# Altium PCB nRF24L01_SMA.PcbDoc
Units mm, origin at the board's own origin, x right, y up, seen from the top; angles counter-clockwise.
Board outline 23.92 x 11.74 mm, 2 copper layers (Top Layer, Bottom Layer); 18 components, 18 nets, 64 pads, 30 vias.
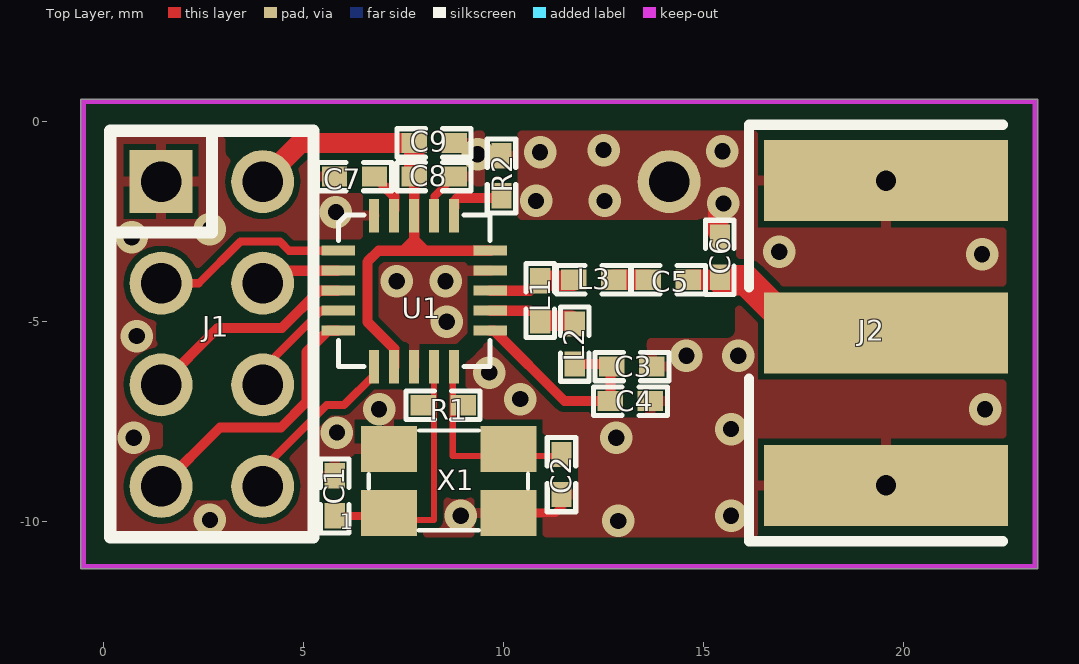
[diagram p0: Top Layer view]
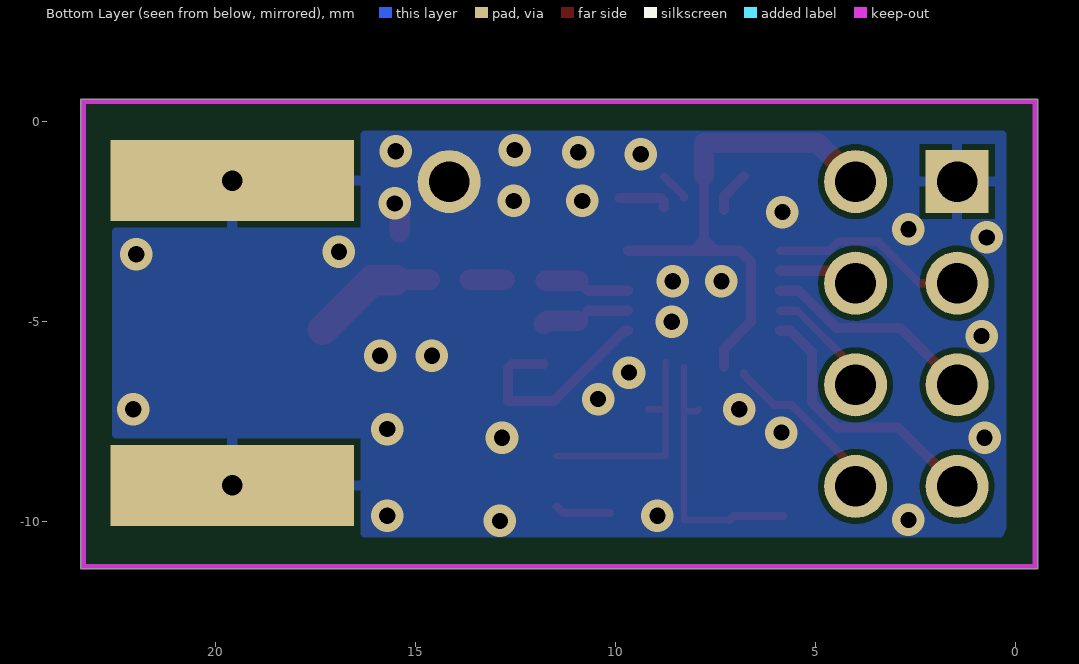
[diagram p1: Bottom Layer view, seen from below]

## Layer stack, top to bottom
Top Layer: signal copper 0.0356
Dielectric: core 0.32, FR-4, Dk 4.8
Bottom Layer: signal copper 0.0356

## Board outline
-0.563,-11.181 23.36,-11.181 23.36,0.563 -0.563,0.563

## Design rules (kind name [scope] priority, off if disabled: settings)
Clearance [All] p1: gap=0.152
ComponentClearance [All] p1: gap=0.254 collisioncheckmode=3 verticalgap=0.254
PolygonConnect PolygonConnect_1 [InComponentClass('All Components')] p1: connectstyle=Relief reliefconductorwidth=0.254 reliefentries=4 polygonreliefangle="90 Angle"
PolygonConnect [All] p2: connectstyle=Direct reliefconductorwidth=0.254 reliefentries=4 polygonreliefangle="90 Angle"
RoutingVias [All] p1: holewidth=0.508 width=0.914 viastyle="Through Hole" minholewidth=0.711 minwidth=1.27 maxholewidth=0.711 maxwidth=1.27
SolderMaskExpansion [All] p1: expansion=0.102
TestPointUsage [All] p1: valid=0 allowmultiple=FALSE
Testpoint [All] p1: side=15 testpointundercomponent=TRUE minsize=1.016 maxsize=2.54 preferedsize=1.524 minholesize=0 maxholesize=1.016 preferedholesize=0.813 testpointgrid=0.025 style=1023 order=0123456789
Width [All] p1: maxlimit=2.54 minlimit=0.127 preferedwidth=0.127
18 further rules are at their usual default settings.

## Components (designator, comment, footprint, x,y, rotation, side; value= is the part's Value field where it differs from the comment)
C1 "15pF" 0402s 5.789,-9.856 r90 top
C2 "15pF" 0402s 11.457,-9.321 r90 top
C3 "2.2nF" 0402s 13.716,-6.121 r180 top
C4 "4.7pF" 0402s 13.678,-6.985 r180 top
C5 "1.0pF" 0402s 14.63,-3.95 r180 top
C6 "0,75pF" 0402s 15.418,-3.886 r90 top
C7 "33nF" 0402s 6.782,-1.372 r180 top
C8 "1nF" 0402s 7.772,-1.372 r0 top
C9 "10nF" 0402s 7.776,-0.533 r0 top
J1 "Comment" IDC8 1.448,-1.499 r270 top
J2 "Comment" SMA_H 19.571,-5.283 r270 top
L1 "3.3nH" 0402s 10.922,-3.975 r270 top
L2 "3.3nH" 0402s 11.786,-6.058 r90 top
L3 "3,3nH" 0402s 11.76,-3.95 r0 top
R1 "1M" 0402s 8.002,-7.088 r0 top
R2 "22k" 0402s 9.957,-1.854 r90 top
U1 "NRF24L01" QFN20L/5x5 6.075,-3.226 r0 top
X1 "16 MHz" BT-XTAL 7.139,-9.781 r0 top

## Footprints (in the part's own frame and the unit in brackets; to place one, negate y for a bottom-side part, rotate by r counter-clockwise, add the part's x,y. Pads: shape width x height; smd on the part's side, far side on the other; paste and mask are expansions set on the pad)
0402s [mil]
  rect 25x20 smd: 1(0,0) 2(39.37,0)
  silkscreen extent -17,-14 56,14
BT-XTAL [mm]
  rect 1.4x1.15 smd: 1(0,0) 2(2.996,0) 3(2.996,1.602) 4(0,1.602)
  silkscreen extent -0.5,-0.43 3.48,2.06
IDC8 [mil]
  rect 62x62 hole 40: 1(0,0)
  round 62 hole 40: 2(0,100) 3(100,0) 4(100,100) 5(200,0) 6(200,100) 7(300,0) 8(300,100)
  silkscreen extent -50,-50 350,150
QFN20L/5x5 [mm]
  rect 0.84x0.25 smd: 1(-0.203,0) 2(-0.203,-0.5) 3(-0.203,-1) 4(-0.203,-1.5) 5(-0.203,-2) 11(3.603,-2) 12(3.603,-1.5) 13(3.603,-1) 14(3.603,-0.5) 15(3.603,0)
  rect 0.25x0.84 smd: 6(0.7,-2.903) 7(1.2,-2.903) 8(1.7,-2.903) 9(2.2,-2.903) 10(2.7,-2.903) 16(2.7,0.878) 17(2.2,0.878) 18(1.7,0.878) 19(1.2,0.878) 20(0.7,0.878)
  silkscreen extent -0.19,-2.89 3.59,0.89
SMA_H [mil]
  rect 80x240 smd: 1(0,0)
  rect 80x240 hole 20: 2(-150,0) 2(150,0)
  silkscreen extent -205,-135 205,115

## Free pads (board coordinates)
  round 1.575 hole 1.016: 0(14.148,-1.499)

## Via types
v1: diameter 0.813, hole 0.406, Top Layer to Bottom Layer, 30 vias

## Nets (pads, with @x,y where several pads share a name; then routed paths per layer and width w, separated by ;. In a path a pad name is that pad's centre, name@x,y a point inside that pad or via, vN(x,y) a via of type N, cw(c..) or ccw(c..) an arc to the next point about the centre after c; other vN are vias at no path point)
CE: J1.3 U1.1 | length 4.9
  Top Layer w0.203: J1.3 2.388,-4.039 3.429,-2.997 4.42,-2.997 4.648,-3.226 U1.1
CSN: J1.4 U1.2 | length 2
  Top Layer w0.254: J1.4 4.301,-3.726 U1.2
GND: C1.2 C2.1 C3.1 C4.1 C6.2 C7.2 C8.2 C9.2 J1.1 J2.2 pad.0 R2.2 U1.8 U1.14 U1.17 U1.20 X1.2 X1.4 | length 2.9
  Top Layer w0.203: 8.28,-1.905 8.28,-1.864 C8.2 ; X1.2 11.302,-9.781 C2.1@11.457,-9.625
  Top Layer w0.508: C6.2@15.38,-2.769 v1@15.38,-2.032
  other v1: 12.878,-9.982 2.667,-9.957 8.941,-9.855 15.697,-9.855 0.762,-7.899 12.827,-7.899 5.842,-7.772 15.697,-7.683 6.896,-7.188 22.047,-7.188 10.427,-6.934 9.652,-6.274 14.58,-5.855 15.875,-5.855 0.838,-5.359 8.585,-5.004 7.341,-3.988 8.56,-3.988 21.971,-3.315 16.904,-3.251 0.711,-2.896 2.667,-2.692 5.817,-2.261 15.507,-2.045 10.82,-1.981 12.535,-1.981 9.36,-0.813 10.922,-0.762 15.481,-0.737 12.509,-0.711
IRQ: J1.8 U1.6 | length 4.2
  Top Layer w0.203: J1.8 3.988,-8.687 5.588,-7.087 6.02,-7.087 6.775,-6.332 U1.6@6.775,-6.281
MISO: J1.7 U1.5 | length 6.8
  Top Layer w0.254: J1.7 2.921,-7.645 4.445,-7.645 5.08,-7.01 5.08,-5.766 5.62,-5.226 U1.5
MOSI: J1.6 U1.4 | length 2.9
  Top Layer w0.203: J1.6 3.988,-6.185 5.447,-4.726 U1.4
N00009: C7.1 U1.19 | length 1
  Top Layer w0.254: C7.1 7.275,-1.864 U1.19@7.275,-2.21
N00010: C1.1 R1.1 U1.9 X1.1 | length 6.7
  Top Layer w0.152: X1.1@7.139,-9.959 8.275,-9.959 8.275,-9.957 8.275,-7.239 7.95,-7.239 R1.1@7.901,-7.19 ; R1.1@8.275,-7.19 U1.9
  Top Layer w0.203: C1.1 7.036,-9.856 X1.1@7.139,-9.959
N00012: R2.1 U1.16 | length 1.3
  Top Layer w0.254: U1.16@8.775,-2.147 8.775,-1.995 8.865,-1.905 R2.1@9.906,-1.905
N00013: C2.2 R1.2 U1.10 X1.3 | length 6.9
  Top Layer w0.152: 8.738,-8.355 C2.2@11.457,-8.355 ; 8.738,-8.317 8.777,-8.357 ; U1.10@8.738,-5.994 8.738,-8.357 X1.3@10.135,-8.357 ; R1.2@8.761,-7.19 R1.2@9.171,-7.19
N00014: C3.2 C4.2 L2.1 U1.11 | length 5.3
  Top Layer w0.254: U1.11 9.772,-5.226 11.532,-6.985 C4.2 C3.2@12.678,-6.159 ; L2.1 C3.2@12.576,-6.058
N00015: L1.2 L2.2 U1.12 | length 1.9
  Top Layer w0.254: U1.12 L1.2@10.673,-4.726
  Top Layer w0.508: L1.2 11.703,-4.975 L2.2
N00016: L1.1 L3.1 U1.13 | length 2.2
  Top Layer w0.254: U1.13 10.671,-4.226 L1.1
  Top Layer w0.508: L1.1 L3.1@11.735,-3.975
N00017: C5.2 L3.2 | length 0.9
  Top Layer w0.508: L3.2 C5.2
N00018: C5.1 C6.1 J2.1 | length 3.1
  Top Layer w0.508: C5.1 C6.1@15.354,-3.95
  Top Layer w0.762: C6.1@15.494,-3.962 16.066,-3.962 J2.1@17.31,-5.207
SCK: J1.5 U1.3 | length 5.4
  Top Layer w0.254: J1.5 2.87,-5.156 4.47,-5.156 5.401,-4.226 U1.3
VDD: C8.1 C9.1 J1.2 U1.7 U1.15 U1.18 | length 13.5
  Top Layer w0.254: U1.7 7.275,-5.674 6.604,-5.004 6.604,-3.505 6.883,-3.226 U1.15 ; 7.493,-3.226 7.775,-2.944 ; C8.1@7.776,-1.368 7.775,-1.369 7.775,-2.949 8.052,-3.226
  Top Layer w0.508: J1.2 3.988,-1.473 4.928,-0.533 C9.1 C8.1@7.776,-1.368
VSS: 

## Polygon pours and split planes (outlines as drawn)
no net on Top Layer "Top Layer-No Net" (hatched 90Degree grid 0.127 track 0.203, remove dead copper, pour order 1000): -122.631,-49.174
GND on Top Layer "Top Layer-GND" (hatched 90Degree grid 0.127 track 0.203, remove dead copper, pour order 1001): 0,0
GND on Top Layer "Top Layer-GND 1" (hatched 90Degree grid 0.127 track 0.203, remove dead copper, pour order 1002): 0,0 22.796,0 22.796,-10.617 0,-10.617
GND on Bottom Layer "Bottom Layer-GND" (hatched 90Degree grid 0.127 track 0.203, remove dead copper, pour order 1003): 14.427,0.127 22.796,0.127 22.796,-10.617 14.592,-10.617
GND on Bottom Layer "Bottom Layer-GND 1" (hatched 90Degree grid 0.127 track 0.203, remove dead copper, pour order 1004): 0,0 15.862,0 15.862,-10.63 0,-10.63
VDD on Bottom Layer "Bottom Layer-VDD" (hatched 90Degree grid 0.127 track 0.178, remove dead copper, pour order 1005): -69.596,-54

## Keep-outs
Keep-Out Layer:
  lines w0.127: -0.5,-11.117 23.296,-11.117 23.296,0.5 -0.5,0.5 -0.5,-11.117

## Silkscreen, mask and mechanical layers (free items; w line width, h text height)
Mechanical 1:
  lines w0.127: 9.436,-2.68 15.596,-2.68 ; 12.522,-5.194 15.557,-5.194 ; 15.583,-5.194 15.583,-4.204
  lines w0.203: 1.575,-5.41 1.575,-5.128 ; 1.753,-8.077 1.753,-7.625 ; 2.484,-9.22 2.896,-9.22 ; 3.162,-0.178 3.306,-0.322 3.306,-0.711 ; 8.763,-9.182 9.017,-9.182 ; 9.017,-5.74 9.271,-5.486 ; 9.665,-2.565 10.058,-2.172 ; 9.982,-2.68 9.982,-2.502 ; 14.986,-3.429 14.986,-2.68
  lines w0.254: 10.401,-4.127 10.401,-2.769 ; 12.319,-5.22 12.802,-5.22 ; 13.31,-5.524 13.31,-5.22
Mechanical 2:
  lines w0.254: -0.5,1.567 -0.5,2.075 ; 1.024,1.313 -0.5,1.821 ; 1.024,2.329 -0.5,1.821 ; 2.613,1.821 -0.5,1.821 ; 20.184,1.821 23.296,1.821 ; 21.772,1.313 23.296,1.821 ; 21.772,2.329 23.296,1.821 ; 23.296,1.567 23.296,2.075 ; 23.919,-12.641 24.427,-11.117 ; 23.919,2.024 24.427,0.5 ; 24.173,-11.117 24.681,-11.117 ; 24.173,0.5 24.681,0.5 ; 24.427,-13.657 24.427,-11.117 ; 24.427,3.04 24.427,0.5 ; 24.935,-12.641 24.427,-11.117 ; 24.935,2.024 24.427,0.5
  text "23.7965 (mm)" at 2.867,0.907 h1.52
  text "\"Sparrow\"" at 5.499,-13.449 h1.52
  text "11.6172 (mm)" at 28.083,-13.459 h1.52 r90
  text ".Layer_Name" at 5.817,-15.964 h1.52

## Text inside footprints (layer, text, board x,y; h text height)
X1: Top Overlay "1" at 5.917,-10.191 h0.38